# EAGLE board InkTime v6 (EAGLE 9.7.0)
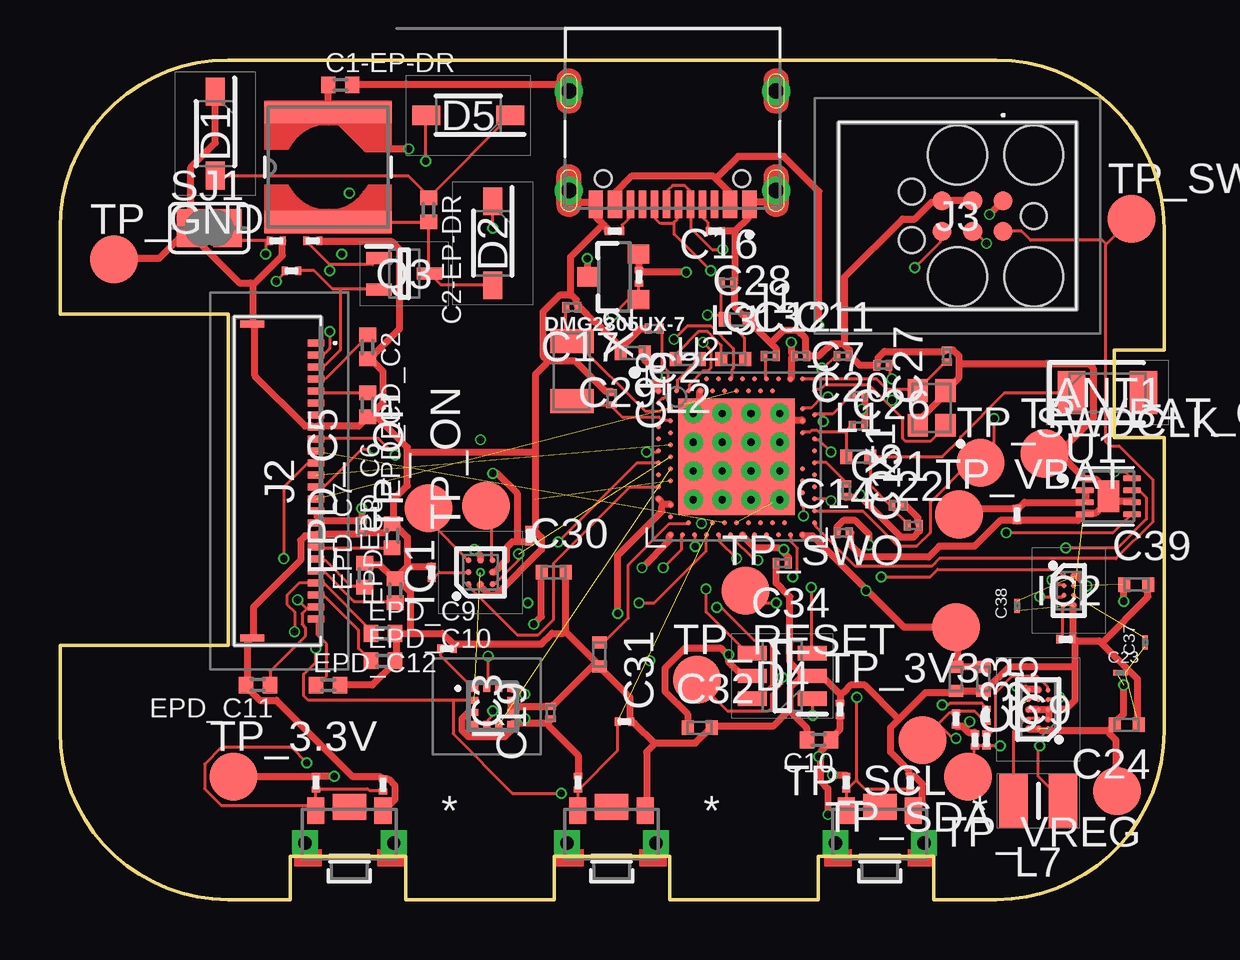
[diagram p0: board, top side]
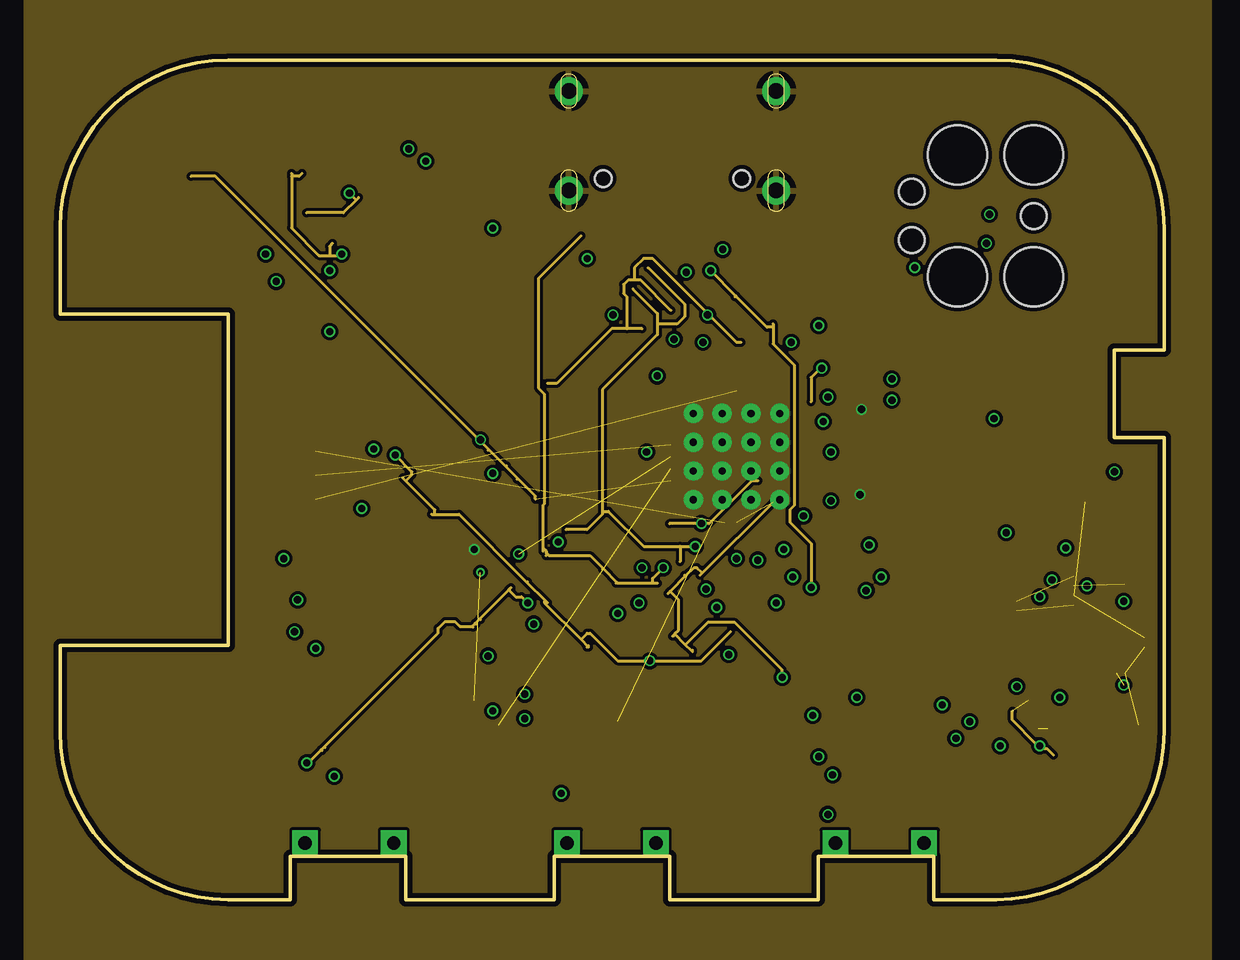
[diagram p1: board, inner layer Route2]
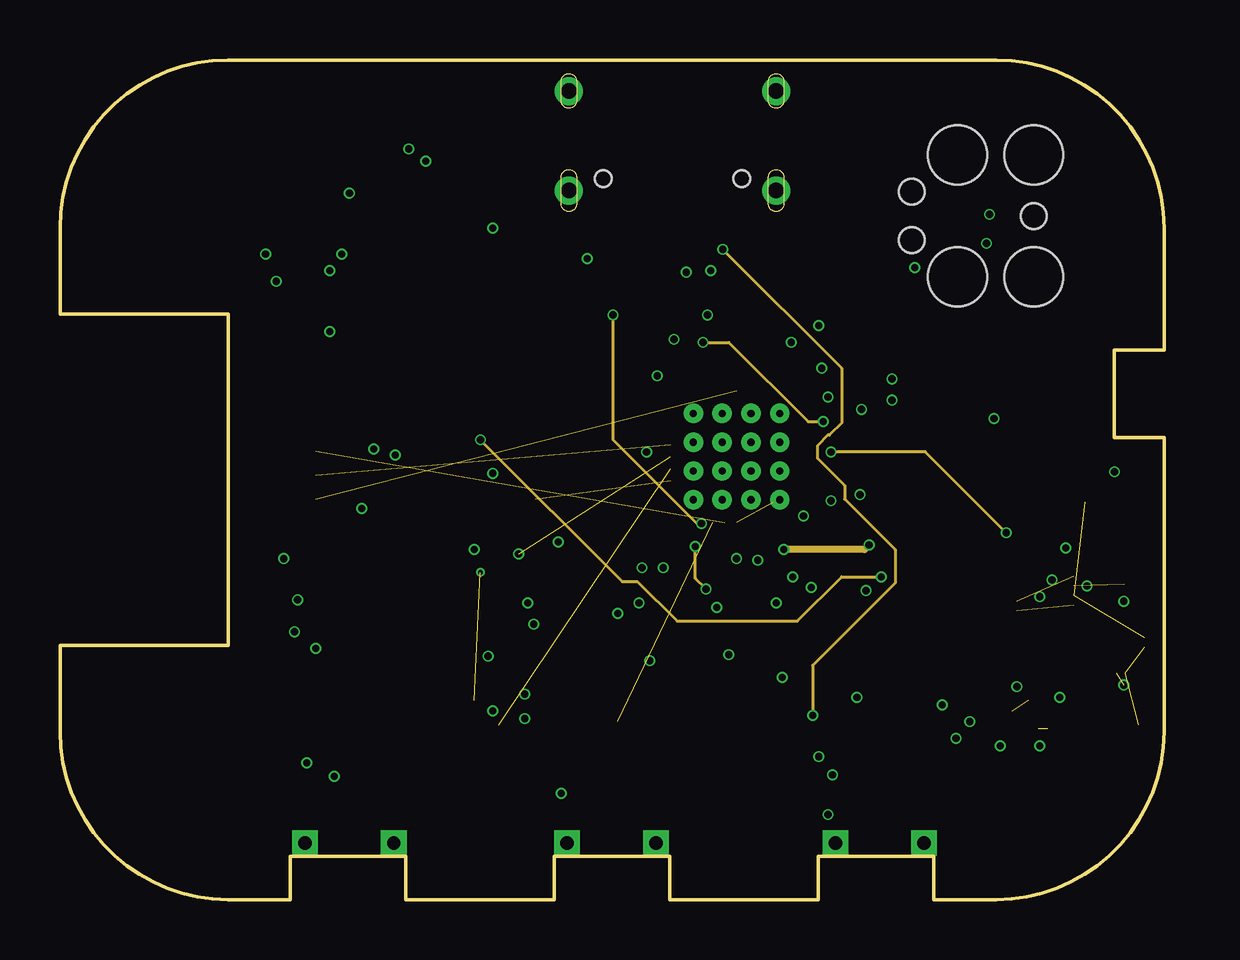
[diagram p2: board, inner layer Route15]
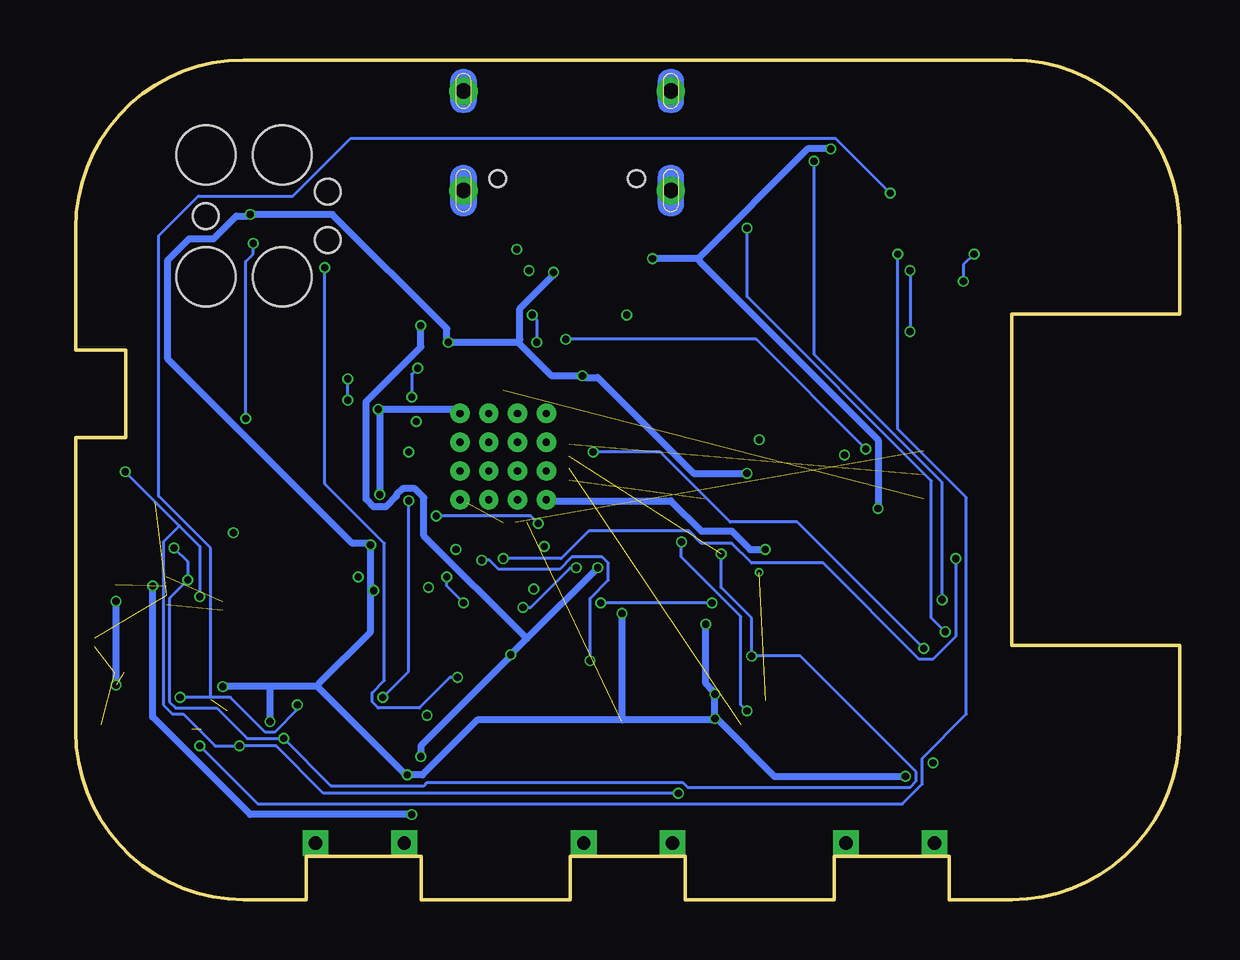
[diagram p3: board, bottom side, seen from below]

Size 46 x 35 mm. Coordinates in mm from the lower left corner, seen from the top.
Outline: 39,0 36.4,0 36.4,1.8 31.6,1.8 31.6,0 25.4,0 25.4,1.8 20.6,1.8 20.6,0 14.4,0 14.4,1.8 9.6,1.8 9.6,0 7,0 arc-90 0,7 0,10.6 7,10.6 7,24.4 0,24.4 0,28 arc-90 7,35 39,35 arc-90 46,28 46,22.91 43.92,22.91 43.92,19.26 46,19.26 46,7 arc-90 39,0
Copper layers (1+2*15+16): Top 0.035mm / dielectric 1.6mm / Route2 0.035mm / dielectric 0.15mm / Route15 0.035mm / dielectric 0.2mm / Bottom 0.035mm
Design rules "jlcpcb-2layers.dru *": minimum track width 5mil, minimum drill 0.3mm, track to track 5mil, track to pad 5mil, pad to pad 5mil, via to via 5mil, smd to smd 5mil, copper to edge 0.2mm, drill to drill 6mil, minimum pad ring 10mil, minimum via ring 3mil, stop-mask expansion 4mil, vias tented up to drill 0mil, thermal gap 10mil
Net classes: 1 turnu : width 0.3 mm

## Footprints (pad centres in the part's own frame; a part is rotated, then mirrored left to right if it is on the bottom)
2450AT18B100E_ANTC3216X140N = smd 1.15 x 1.8: 1 -1.5,0; 2 1.5,0
GRM011R60J152KE01L_1_0201 = smd 0.35 x 0.25: 1 0,0.275; 2 0,-0.275
PERFECT_0402_0402 = smd 0.6 x 0.7: 1 -0.5,0; 2 0.5,0
NORDIC_NRF_3_RESC0201_L = smd 0.28 x 0.43: 1 -0.255,0; 2 0.255,0
GRM011R60J152KE01L_2_CAPC0201X13N = smd 0.22 x 0.23: 1 -0.185,0; 2 0.185,0
NORDIC_NRF_3_RESC0402_L = smd 0.5 x 0.6: 1 -0.5,0; 2 0.5,0
ESP32_C6_LIBRARY_5_SOD3716X135N = smd 1.15 x 0.8: 1 -1.75,0; 2 1.75,0
ESP32_C6_LIBRARY_3_SOT95P280X145-6N = smd 1.2 x 0.6: 1 -1.25,0.95; 2 -1.25,0; 3 -1.25,-0.95; 4 1.25,-0.95; 5 1.25,0; 6 1.25,0.95
ESP32_C6_LIBRARY_4_ESP32_C6_LIBRARY_4_ESP32_C6_LIBRARY_4_ESP32_C6_LIBRARY_4_ESP32_WROVER_SPARKFUN-DISCRETESEMI_SOT23-3 = smd 0.8 x 0.9: 1 -0.95,-1; 2 0.95,-1; 3 0,1.1
DRV2605YZFR_BGA9C50P3X3_144X144X62 = smd 0.25 x 0.25: A1 -0.5,0.5; A2 0,0.5; A3 0.5,0.5; B1 -0.5,0; B2 0,0; B3 0.5,0; C1 -0.5,-0.5; C2 0,-0.5; C3 0.5,-0.5
BQ25180YBGR_BGA8C40P2X4_100X155X50 = smd 0.2 x 0.2: A1 -0.2,0.6; A2 0.2,0.6; B1 -0.2,0.2; B2 0.2,0.2; C1 -0.2,-0.2; C2 0.2,-0.2; D1 -0.2,-0.6; D2 0.2,-0.6
BMA423_BMA423 = smd 0.3 x 0.35: 1 -0.75,-0.775; 2 -0.25,-0.775; 3 0.25,-0.775; 4 0.75,-0.775; 7 0.75,0.775; 8 0.25,0.775; 9 -0.25,0.775; 10 -0.75,0.775 | smd 0.35 x 0.3: 5 0.775,-0.25; 6 0.775,0.25; 11 -0.775,0.25; 12 -0.775,-0.25
RT6160AWSC_BGA15C40P3X5_140X230X60 = smd 0.216 x 0.216: A1 -0.4,0.8; A2 0,0.8; A3 0.4,0.8; B1 -0.4,0.4; B2 0,0.4; B3 0.4,0.4; C1 -0.4,0; C2 0,0; C3 0.4,0; D1 -0.4,-0.4; D2 0,-0.4; D3 0.4,-0.4; E1 -0.4,-0.8; E2 0,-0.8; E3 0.4,-0.8
KH-TYPE-C-16P_KINGHELM_KH-TYPE-C-16P = smd 0.6 x 1.15: A1_B12 -3.2,4.725; A4_B9 -2.4,4.725; A9_B4 2.4,4.725; A12_B1 3.2,4.725 | smd 0.3 x 1.15: A5 -1.25,4.725; A6 -0.25,4.725; A7 0.25,4.725; A8 1.25,4.725; B5 1.75,4.725; B6 0.75,4.725; B7 -0.75,4.725; B8 -1.75,4.725 | drill 0.65 pad 1.05: SH1 -4.32,0; SH2 4.32,0; SH3 -4.32,4.15; SH4 4.32,4.15 | hole 0.7: -2.89,3.65; 2.89,3.65
503480-2400_5034802400 = smd 0.3 x 0.7: 1 -5.75,1.525; 2 -5.25,1.525; 3 -4.75,1.525; 4 -4.25,1.525; 5 -3.75,1.525; 6 -3.25,1.525; 7 -2.75,1.525; 8 -2.25,1.525; 9 -1.75,1.525; 10 -1.25,1.525; 11 -0.75,1.525; 12 -0.25,1.525; 13 0.25,1.525; 14 0.75,1.525; 15 1.25,1.525; 16 1.75,1.525; 17 2.25,1.525; 18 2.75,1.525; 19 3.25,1.525; 20 3.75,1.525; 21 4.25,1.525; 22 4.75,1.525; 23 5.25,1.525; 24 5.75,1.525 | smd 0.3 x 1: MP1 -6.54,-1.125; MP2 6.54,-1.125
TC2030-IDC_TC2030IDC = smd 0.783 x 0.783: 1 -0.953,-0.635; 2 -0.953,0.635; 3 0.317,-0.635; 4 0.317,0.635; 5 1.588,-0.635; 6 1.588,0.635 | hole 2.451: -2.223,-2.54; -2.223,2.54; 0.952,-2.54; 0.952,2.54 | hole 1.067: -2.223,0; 2.857,-1.016; 2.857,1.016
NORDIC_NRF_2_RESC0402_L = smd 0.5 x 0.6: 1 -0.5,0; 2 0.5,0
ESP32_C6_LIBRARY_2_IND_4828-WE-TPC_WRE = smd 0.9 x 5.3: 1 -2.286,0; 2 2.286,0
MLP2016SR47MT0S1_INDC2016X100N = smd 1.2 x 2.2: 1 -1.028,0; 2 1.028,0
ESP32_C6_LIBRARY_6_SOT65P210X110-3N = smd 1.05 x 0.5: 1 -1.05,0.65; 2 -1.05,-0.65; 3 1.05,0
CPF0201D7K68C1_0201 = smd 0.35 x 0.25: 1 0,0.275; 2 0,-0.275
ERA-1AEB3401C_0201 = smd 0.35 x 0.25: 1 0,0.275; 2 0,-0.275
ESP32_C6_LIBRARY_7_JUMPER_SJ = smd 1.168 x 1.6: 1 -0.762,0; 2 0.762,0
2025-10-22_07-23-44_LIBRARY_SW_EVP-AKE31A_PAN = smd 0.711 x 1.092: 1 -1.4,-0.972; 2 1.4,-0.972 | drill 0.559 pad 0.914 square: 3 -1.848,0.381; 4 1.848,0.381 | smd 1.397 x 1.092: 5 0,-1.124
HECTOR_WATCH_1_TP20R = smd 2 x 2: TP 0,0
ESP32_C6_LIBRARY_SON50P200X200X80-9N = smd 0.76 x 0.27: 1 -0.985,0.75; 2 -0.985,0.25; 3 -0.985,-0.25; 4 -0.985,-0.75; 5 0.985,-0.75; 6 0.985,-0.25; 7 0.985,0.25; 8 0.985,0.75 | smd 0.9 x 1.3: 9 0,0
NORDIC_NRF_4_AQFN50P700X700X85_HS-74N = smd 4.85 x 4.85: P$74 0,0 | drill 0.3 pad 0.6: P$75 -1.8,1.8; P$76 -0.6,1.8; P$77 0.6,1.8; P$78 1.8,1.8; P$79 -1.8,0.6; P$80 -0.6,0.6; P$81 0.6,0.6; P$82 1.8,0.6; P$83 -1.8,-0.6; P$84 -0.6,-0.6; P$85 0.6,-0.6; P$86 1.8,-0.6; P$87 -1.8,-1.8; P$88 -0.6,-1.8; P$89 0.6,-1.8; P$90 1.8,-1.8 | smd 0.2 x 0.2: P$A8 -1.25,3.25; P$A10 -0.75,3.25; P$A12 -0.25,3.25; P$A14 0.25,3.25; P$A16 0.75,3.25; P$A18 1.25,3.25; P$A20 1.75,3.25; P$A22 2.25,3.25; P$A23 2.75,3.25; P$AA24 3.25,-2.25; P$AB2 -2.75,-2.5; P$AC5 -2,-2.75; P$AC9 -1,-2.75; P$AC11 -0.5,-2.75; P$AC13 0,-2.75; P$AC15 0.5,-2.75; P$AC17 1,-2.75; P$AC19 1.5,-2.75; P$AC21 2,-2.75; P$AC24 3.25,-2.75; P$AD2 -2.75,-3.25; P$AD4 -2.25,-3.25; P$AD6 -1.75,-3.25; P$AD8 -1.25,-3.25; P$AD10 -0.75,-3.25; P$AD12 -0.25,-3.25; P$AD14 0.25,-3.25; P$AD16 0.75,-3.25; P$AD18 1.25,-3.25; P$AD20 1.75,-3.25; P$AD22 2.25,-3.25; P$AD23 2.75,-3.25; P$B1 -3.25,2.75; P$B3 -2.5,2.75; P$B5 -2,2.75; P$B7 -1.5,2.75; P$B9 -1,2.75; P$B11 -0.5,2.75; P$B13 0,2.75; P$B15 0.5,2.75; P$B17 1,2.75; P$B19 1.5,2.75; P$B24 3.25,2.75; P$C1 -3.25,2.25; P$D2 -2.75,2; P$D23 2.75,2; P$E24 3.25,1.75; P$F2 -2.75,1.5; P$F23 2.75,1.5; P$G1 -3.25,1.25; P$H2 -2.75,1; P$H23 2.75,1; P$J1 -3.25,0.75; P$J24 3.25,0.75; P$K2 -2.75,0.5; P$L1 -3.25,0.25; P$L24 3.25,0.25; P$M2 -2.75,0; P$N1 -3.25,-0.25; P$N24 3.25,-0.25; P$P2 -2.75,-0.5; P$P23 2.75,-0.5; P$R1 -3.25,-0.75; P$R24 3.25,-0.75; P$T2 -2.75,-1; P$T23 2.75,-1; P$U1 -3.25,-1.25; P$U24 3.25,-1.25; P$V23 2.75,-1.5; P$W1 -3.25,-1.75; P$W24 3.25,-1.75; P$Y2 -2.75,-2; P$Y23 2.75,-2
NORDIC_NRF_BT-XTAL_2016_N = smd 0.95 x 0.85: 1 -0.725,-0.575; 2 0.725,-0.575; 3 0.725,0.575; 4 -0.725,0.575
NORDIC_NRF_1_XTAL_3215_N = smd 1 x 1.8: 1 -1.25,0; 2 1.25,0

## Placement (x,y rotation side)
ANT1  2450AT18B100E  [2450AT18B100E_ANTC3216X140N]  43.65,21.13 0 top
C1  1uF  [GRM011R60J152KE01L_1_0201]  13.46,4.78 0 top
C1-EP-DR  10uF  [PERFECT_0402_0402]  11.68,33.96 0 top
C2  100nF  [NORDIC_NRF_3_RESC0201_L]  24.76,23.8 180 top
C2-EP-DR  4.7uF/25V  [PERFECT_0402_0402]  15.36,28.75 270 top
C3  1uF  [GRM011R60J152KE01L_1_0201]  15.49,13.64 0 top
C4  1uF  [GRM011R60J152KE01L_1_0201]  23.52,7.42 270 top
C5  1uF  [GRM011R60J152KE01L_1_0201]  35.43,4.88 0 top
C6  0.1uF  [GRM011R60J152KE01L_1_0201]  32.51,7.92 180 top
C7  N.C.  [NORDIC_NRF_3_RESC0201_L]  33.27,21.01 0 top
C8  0.1uF  [GRM011R60J152KE01L_1_0201]  19.55,15.16 0 top
C9  0.1uF  [GRM011R60J152KE01L_1_0201]  39.87,16.05 180 top
C10  4.7uF  [PERFECT_0402_0402]  31.62,6.66 180 top
C11  100pF  [NORDIC_NRF_3_RESC0201_L]  32.63,22.66 0 top
C12  100nF  [NORDIC_NRF_3_RESC0201_L]  30.86,22.66 0 top
C13  N.C.  [NORDIC_NRF_3_RESC0201_L]  29.58,22.66 0 top
C14  100nF  [NORDIC_NRF_3_RESC0201_L]  32.63,15.29 0 top
C15  820pF  [NORDIC_NRF_3_RESC0201_L]  32.76,17.07 270 top
C16  47nF  [NORDIC_NRF_3_RESC0201_L]  27.81,25.71 0 top
C17  12pF  [NORDIC_NRF_3_RESC0201_L]  21.33,24.69 180 top
C18  12pF  [NORDIC_NRF_3_RESC0201_L]  22.98,20.88 270 top
C19  100nF  [NORDIC_NRF_3_RESC0201_L]  20.44,7.8 90 top
C20  1pF  [NORDIC_NRF_3_RESC0201_L]  33.27,19.74 0 top
C21  1pF  [NORDIC_NRF_3_RESC0201_L]  34.92,16.43 0 top
C22  N.C.  [NORDIC_NRF_3_RESC0201_L]  35.55,15.6 0 top
C23  0.1uF  [GRM011R60J152KE01L_2_CAPC0201X13N]  44.19,9.45 0 top
C24  10uF  [NORDIC_NRF_3_RESC0402_L]  44.44,7.29 180 top
C25  22uF  [NORDIC_NRF_3_RESC0402_L]  38.47,9.2 270 top
C26  12pF  [NORDIC_NRF_3_RESC0201_L]  34.28,22.28 180 top
C27  12pF  [NORDIC_NRF_3_RESC0201_L]  36.95,22.66 90 top
C28  1.0μF  [NORDIC_NRF_3_RESC0402_L]  28.19,24.18 0 top
C29  4.7μF  [NORDIC_NRF_3_RESC0402_L]  23.87,22.78 180 top
C30  4.7μF  [NORDIC_NRF_3_RESC0402_L]  20.57,13.64 0 top
C31  4.7μF  [NORDIC_NRF_3_RESC0402_L]  22.47,10.21 270 top
C32  4.7μF  [NORDIC_NRF_3_RESC0402_L]  26.66,7.16 0 top
C33  22uF  [NORDIC_NRF_3_RESC0402_L]  37.33,9.2 270 top
C34  100nF  [NORDIC_NRF_3_RESC0201_L]  30.09,14.02 180 top
C37  1uF  [GRM011R60J152KE01L_2_CAPC0201X13N]  45.21,10.72 90 top
C38  1uF  [GRM011R60J152KE01L_2_CAPC0201X13N]  39.87,12.24 90 top
C39  10uF  [NORDIC_NRF_3_RESC0402_L]  44.85,13.13 0 top
D1  MBR0530  [ESP32_C6_LIBRARY_5_SOD3716X135N]  6.47,31.93 270 top
D2  MBR0530  [ESP32_C6_LIBRARY_5_SOD3716X135N]  18.03,27.36 270 top
D4  USBLC6-2SC6Y  [ESP32_C6_LIBRARY_3_SOT95P280X145-6N]  30.09,9.32 180 top
D5  MBR0530  [ESP32_C6_LIBRARY_5_SOD3716X135N]  17.01,32.69 180 top
DMG2305UX-7  20V/4.2A/52mΩ/1.4W  [ESP32_C6_LIBRARY_4_ESP32_C6_LIBRARY_4_ESP32_C6_LIBRARY_4_ESP32_C6_LIBRARY_4_ESP32_WROVER_SPARKFUN-DISCRETESEMI_SOT23-3]  23.11,25.96 90 top
EPD_C1  1uF/50V  [PERFECT_0402_0402]  12.82,20.62 270 top
EPD_C2  1uF/50V  [PERFECT_0402_0402]  12.82,23.04 270 top
EPD_C5  0.1uF/50V  [NORDIC_NRF_3_RESC0201_L]  12.57,15.55 90 top
EPD_C6  1uF/50V  [PERFECT_0402_0402]  13.84,15.16 90 top
EPD_C7  1uF/50V  [PERFECT_0402_0402]  12.69,13.51 90 top
EPD_C8  1uF/50V  [PERFECT_0402_0402]  13.96,12.88 90 top
EPD_C9  1uF/50V  [PERFECT_0402_0402]  13.46,11.1 0 top
EPD_C10  1uF/50V  [PERFECT_0402_0402]  13.46,9.96 0 top
EPD_C11  1uF/50V  [PERFECT_0402_0402]  8.25,8.94 180 top
EPD_C12  1uF/50V  [PERFECT_0402_0402]  11.17,8.94 0 top
IC1  DRV2605YZFR  [DRV2605YZFR_BGA9C50P3X3_144X144X62]  17.52,13.64 90 top
IC2  BQ25180YBGR  [BQ25180YBGR_BGA8C40P2X4_100X155X50]  42.03,12.88 0 top
IC3  BMA421  [BMA423_BMA423]  18.03,8.05 270 top
IC9  RT6160AWSC  [RT6160AWSC_BGA15C40P3X5_140X230X60]  40.76,7.92 180 top
J1  KH-TYPE-C-16P  [KH-TYPE-C-16P_KINGHELM_KH-TYPE-C-16P]  25.52,33.71 180 top
J2  503480-2400  [503480-2400_5034802400]  9.14,17.45 270 top
J3  TC2030-IDC  [TC2030-IDC_TC2030IDC]  38.35,28.5 180 top
L1  3.9nH  [NORDIC_NRF_2_RESC0402_L]  33.27,18.47 0 top
L2  10μH  [NORDIC_NRF_2_RESC0402_L]  26.16,22.53 180 top
L3  15nH  [NORDIC_NRF_2_RESC0402_L]  28.06,22.53 0 top
L5  68uH  [ESP32_C6_LIBRARY_2_IND_4828-WE-TPC_WRE]  11.17,30.53 90 top
L7  FTC252012SR47MBCA  [MLP2016SR47MT0S1_INDC2016X100N]  40.76,4.12 0 top
Q3  SI1308EDL-T1-GE3  [ESP32_C6_LIBRARY_6_SOT65P210X110-3N]  14.34,26.09 0 top
R1  10K  [CPF0201D7K68C1_0201]  41.9,10.85 270 top
R1_EP_DR1  0.47  [CPF0201D7K68C1_0201]  9.65,26.21 90 top
R1_USB  5K1  [CPF0201D7K68C1_0201]  27.3,27.86 270 top
R2  0  [CPF0201D7K68C1_0201]  38.6,6.66 180 top
R2_EP_DR  10K  [CPF0201D7K68C1_0201]  10.53,27.46 270 top
R2_USB  5K1  [CPF0201D7K68C1_0201]  23.11,27.86 270 top
R3  0  [CPF0201D7K68C1_0201]  16.12,10.47 270 top
R4  0  [CPF0201D7K68C1_0201]  38.6,7.67 180 top
R5  10K  [CPF0201D7K68C1_0201]  10.66,4.88 180 top
R7  10K  [CPF0201D7K68C1_0201]  32.76,4.88 180 top
R8  10K  [CPF0201D7K68C1_0201]  21.58,4.88 180 top
R17  3K3  [ERA-1AEB3401C_0201]  37.33,7.54 180 top
R18  3K3  [ERA-1AEB3401C_0201]  38.12,6.66 0 top
R_PWR_EPD  10K  [CPF0201D7K68C1_0201]  24.12,25.96 180 top
R_TYPE_SEL  2.2  [CPF0201D7K68C1_0201]  9.01,27.46 270 top
SJ1  [ESP32_C6_LIBRARY_7_JUMPER_SJ]  6.22,27.99 0 top
SW_DN  2025-10-22_07-23-44_LIBRARY_EVP-AKE31ASW_EVP-AKE31A_PAN  [2025-10-22_07-23-44_LIBRARY_SW_EVP-AKE31A_PAN]  34.16,2.74 180 top
SW_ENT  2025-10-22_07-23-44_LIBRARY_EVP-AKE31ASW_EVP-AKE31A_PAN  [2025-10-22_07-23-44_LIBRARY_SW_EVP-AKE31A_PAN]  22.98,2.74 180 top
SW_UP  2025-10-22_07-23-44_LIBRARY_EVP-AKE31ASW_EVP-AKE31A_PAN  [2025-10-22_07-23-44_LIBRARY_SW_EVP-AKE31A_PAN]  12.06,2.74 180 top
TP_3.3V  HECTOR_WATCH_1_TPTP20R  [HECTOR_WATCH_1_TP20R]  7.23,5.13 0 top
TP_3V3  HECTOR_WATCH_1_TPTP20R  [HECTOR_WATCH_1_TP20R]  37.33,11.35 180 top
TP_GND  HECTOR_WATCH_1_TPTP20R  [HECTOR_WATCH_1_TP20R]  2.25,26.69 0 top
TP_ON  HECTOR_WATCH_1_TPTP20R  [HECTOR_WATCH_1_TP20R]  17.74,16.41 90 top
TP_OP  HECTOR_WATCH_1_TPTP20R  [HECTOR_WATCH_1_TP20R]  15.36,16.31 90 top
TP_RESET  HECTOR_WATCH_1_TPTP20R  [HECTOR_WATCH_1_TP20R]  26.54,9.16 0 top
TP_SCL  HECTOR_WATCH_1_TPTP20R  [HECTOR_WATCH_1_TP20R]  35.94,6.66 180 top
TP_SDA  HECTOR_WATCH_1_TPTP20R  [HECTOR_WATCH_1_TP20R]  37.84,5.13 180 top
TP_SWDCLK  HECTOR_WATCH_1_TPTP20R  [HECTOR_WATCH_1_TP20R]  38.35,18.21 0 top
TP_SWIO  HECTOR_WATCH_1_TPTP20R  [HECTOR_WATCH_1_TP20R]  44.65,28.38 0 top
TP_SWO  HECTOR_WATCH_1_TPTP20R  [HECTOR_WATCH_1_TP20R]  28.57,12.88 0 top
TP_VBAT  HECTOR_WATCH_1_TPTP20R  [HECTOR_WATCH_1_TP20R]  37.46,16.05 0 top
TP_VBAT_GND  HECTOR_WATCH_1_TPTP20R  [HECTOR_WATCH_1_TP20R]  41.02,18.59 0 top
TP_VREG  HECTOR_WATCH_1_TPTP20R  [HECTOR_WATCH_1_TP20R]  44.04,4.51 180 top
U1  MAX17048G+T10  [ESP32_C6_LIBRARY_SON50P200X200X80-9N]  43.68,16.81 0 top
U2  NRF52840_QF  [NORDIC_NRF_4_AQFN50P700X700X85_HS-74N]  28.19,18.47 0 top
X1  32MHz  [NORDIC_NRF_BT-XTAL_2016_N]  36.32,20.5 90 top
X2  32.768kHz  [NORDIC_NRF_1_XTAL_3215_N]  21.33,22.02 270 top

## Library data of the parts
ANT1 = InkTime_v5; ARROW_PART_NUMBER: 2450AT18B100E; ARROW_PRICE-STOCK: https://www.arrow.com/en/products/2450at18b100e/johanson-dielectrics?utm_currency=USD&region=nac; DESCRIPTION: Antennas 2.45GHz ANTENNA; HEIGHT: 1.4mm; MANUFACTURER_NAME: JOHANSON TECHNOLOGY; MANUFACTURER_PART_NUMBER: 2450AT18B100E; MOUSER_PART_NUMBER: 609-2450AT18B100E; MOUSER_PRICE-STOCK: https://www.mouser.co.uk/ProductDetail/Johanson-Technology/2450AT18B100E?qs=yCnrNFeXz%252Bh5MFsFIXGZGA%3D%3D
C1 C1-EP-DR C2-EP-DR C3-C6 C8-C10 C34 EPD_C1 EPD_C2 EPD_C5-EPD_C12 R1_EP_DR1 R1_USB R2_EP_DR R2_USB R5 R7 R8 R_PWR_EPD R_TYPE_SEL SJ1 TP_ON TP_OP TP_VBAT TP_VBAT_GND = Library_proiect
C2 C7 C11-C22 C24-C33 C39 L1-L3 R1-R4 R17 R18 TP_3.3V TP_3V3 TP_GND TP_RESET TP_SCL TP_SDA TP_SWDCLK TP_SWIO TP_SWO TP_VREG U2 X1 X2 = InkTime_v5
C23 C37 C38 = InkTime_v5; AVAILABILITY: In Stock; CHECK_PRICES: https://www.snapeda.com/parts/GRM011R60J152KE01L/Murata/view-part/?ref=eda; DESCRIPTION: SMD Capacitor X5R(EIA) with Capacitance: 1500pF Tol. 10%. Rated Voltage: 6.3Vdc; MF: Murata; MP: GRM011R60J152KE01L; PACKAGE: 0201 Murata; PRICE: None; SNAPEDA_LINK: https://www.snapeda.com/parts/GRM011R60J152KE01L/Murata/view-part/?ref=snap
D1 D2 D5 = Library_proiect; AVAILABILITY: In Stock; CHECK_PRICES: https://www.snapeda.com/parts/MBR0530/Onsemi/view-part/?ref=eda; DESCRIPTION: Diode Schottky 30 V 500mA Surface Mount SOD-123; MF: ON Semiconductor; MP: MBR0530; PACKAGE: SOD-123-2 ON Semiconductor; PRICE: None; PURCHASE-URL: https://www.snapeda.com/api/url_track_click_mouser/?unipart_id=179458&manufacturer=ON Semiconductor&part_name=MBR0530&search_term=None; SNAPEDA_LINK: https://www.snapeda.com/parts/MBR0530/Onsemi/view-part/?ref=snap
D4 = Library_proiect; AVAILABILITY: In Stock; CHECK_PRICES: https://www.snapeda.com/parts/USBLC6-2SC6Y/STMicroelectronics/view-part/?ref=eda; DESCRIPTION: 17V Clamp 5A (8/20µs) Ipp Tvs Diode Surface Mount SOT-23-6; MF: STMicroelectronics; MP: USBLC6-2SC6Y; PACKAGE: SOT-23-6 STMicroelectronics; PRICE: None; SNAPEDA_LINK: https://www.snapeda.com/parts/USBLC6-2SC6Y/STMicroelectronics/view-part/?ref=snap
DMG2305UX-7 = Library_proiect; PROD_ID: TRAN-14388
IC1 = Library_proiect; ARROW_PART_NUMBER: DRV2605YZFR; ARROW_PRICE-STOCK: https://www.arrow.com/en/products/drv2605yzfr/texas-instruments?region=nac; DESCRIPTION: Haptic Driver for ERM/LRA with Built-In Library and Smart Loop Architecture; HEIGHT: 0.625mm; MANUFACTURER_NAME: Texas Instruments; MANUFACTURER_PART_NUMBER: DRV2605YZFR
IC2 = InkTime_v5; ARROW_PART_NUMBER: BQ25180YBGR; ARROW_PRICE-STOCK: https://www.arrow.com/en/products/bq25180ybgr/texas-instruments?utm_currency=USD&region=nac; DESCRIPTION: Charger IC Lithium Ion/Polymer, Lithium Iron Phosphate 8-DSBGA (1.6x1.1); HEIGHT: 0.5mm; MANUFACTURER_NAME: Texas Instruments; MANUFACTURER_PART_NUMBER: BQ25180YBGR; MOUSER_PART_NUMBER: 595-BQ25180YBGR; MOUSER_PRICE-STOCK: https://www.mouser.co.uk/ProductDetail/Texas-Instruments/BQ25180YBGR?qs=doiCPypUmgEWjAK%252BJAX6Tw%3D%3D
IC3 = InkTime_v5; ARROW_PART_NUMBER: BMA423; ARROW_PRICE-STOCK: https://www.arrow.com/en/products/bma423/bosch; DESCRIPTION: Accelerometers Triaxial low-g 12bit Acceleration Sensor; HEIGHT: 1mm; MANUFACTURER_NAME: BOSCH; MANUFACTURER_PART_NUMBER: BMA423; MOUSER_PART_NUMBER: 262-BMA423; MOUSER_PRICE-STOCK: https://www.mouser.co.uk/ProductDetail/Bosch-Sensortec/BMA423?qs=HXFqYaX1Q2xC%252BSgeGoX3mg%3D%3D
IC9 = InkTime_v5; DESCRIPTION: Buck-Boost Regulator Positive Output Step-Up/Step-Down I2C DC-DC Controller IC 15-WL-CSP (BSC) (1.4x2.3); HEIGHT: 0.6mm; MANUFACTURER_NAME: RICHTEK; MANUFACTURER_PART_NUMBER: RT6160AWSC; MOUSER_PART_NUMBER: 835-RT6160AWSC; MOUSER_PRICE-STOCK: https://www.mouser.co.uk/ProductDetail/Richtek/RT6160AWSC?qs=amGC7iS6iy%2FLd9PSoixZXQ%3D%3D
J1 = Library_proiect; AVAILABILITY: Not in stock; CHECK_PRICES: https://www.snapeda.com/parts/KH-TYPE-C-16P/Kinghelm/view-part/?ref=eda; MF: kinghelm; MP: KH-TYPE-C-16P; PACKAGE: None; PRICE: None; SNAPEDA_LINK: https://www.snapeda.com/parts/KH-TYPE-C-16P/Kinghelm/view-part/?ref=snap
J2 = Library_proiect; DESCRIPTION: FFC & FPC Connectors 0.5mm FPC RA SMT Dual Contact 24Ckt; HEIGHT: 1.87mm; MANUFACTURER_NAME: Molex; MANUFACTURER_PART_NUMBER: 503480-2400; MOUSER_PART_NUMBER: 538-503480-2400; MOUSER_PRICE-STOCK: https://www.mouser.co.uk/ProductDetail/Molex/503480-2400?qs=OAhjpuo3Vu7efIoxFh9AOw%3D%3D
J3 = InkTime_v5; DESCRIPTION: CABLE ADAPTER 6 POS; HEIGHT: 19mm; MANUFACTURER_NAME: Tag Connect; MANUFACTURER_PART_NUMBER: TC2030-IDC
L5 = Library_proiect; COPYRIGHT: Copyright (C) 2024 Ultra Librarian. All rights reserved.; MANUFACTURER_PART_NUMBER: 744043680; MFR_NAME: Wurth Electronics
L7 = InkTime_v5; DESCRIPTION: SMD / SMT Inductors (Coils), L=0.47?H, L x W x T :; HEIGHT: 1mm; JLCPCB: https://jlcpcb.com/partdetail/6763488-FTC252012SR47MBCA/C5832368; MANUFACTURER_NAME: TDK; MANUFACTURER_PART_NUMBER: FTC252012SR47MBCA
Q3 = Library_proiect; AVAILABILITY: In Stock; CHECK_PRICES: https://www.snapeda.com/parts/SI1308EDL-T1-GE3/Vishay+Siliconix/view-part/?ref=eda; DESCRIPTION: Si1308EDL-T1-GE3 N-channel MOSFET Transistor, 1.5 A, 30 V, 3-Pin SC-70 | Siliconix / Vishay SI1308EDL-T1-GE3; MF: Vishay Siliconix; MP: SI1308EDL-T1-GE3; PACKAGE: SOT-323 Vishay Semiconductor; PRICE: None; PURCHASE-URL: https://www.snapeda.com/api/url_track_click_mouser/?unipart_id=274603&manufacturer=Vishay Siliconix&part_name=SI1308EDL-T1-GE3&search_term=None; SNAPEDA_LINK: https://www.snapeda.com/parts/SI1308EDL-T1-GE3/Vishay+Siliconix/view-part/?ref=snap
SW_DN SW_ENT SW_UP = Library_proiect; COPYRIGHT: Copyright (C) 2025 Ultra Librarian. All rights reserved.; DIGI-KEY_PART_NUMBER_1: P123437TR-ND; DIGI-KEY_PART_NUMBER_2: P123437CT-ND; DIGI-KEY_PART_NUMBER_3: P123437DKR-ND; MANUFACTURER_NAME: Panasonic; MANUFACTURER_PART_NUMBER: EVP-AKE31A
U1 = Library_proiect; AVAILABILITY: In Stock; CHECK_PRICES: https://www.snapeda.com/parts/MAX17048G+T10/Analog+Devices/view-part/?ref=eda; DESCRIPTION: 3µA 1-Cell/2-Cell Fuel Gauge with ModelGauge; MF: Analog Devices; MP: MAX17048G+T10; PACKAGE: TDFN-8 Maxim; PRICE: None; PURCHASE-URL: https://www.snapeda.com/api/url_track_click_mouser/?unipart_id=329239&manufacturer=Analog Devices&part_name=MAX17048G+T10&search_term=None; SNAPEDA_LINK: https://www.snapeda.com/parts/MAX17048G+T10/Analog+Devices/view-part/?ref=snap

## Nets
3V3 [turnu ]: C8.2 C12.1 C14.1 C19.1 C25.1 C29.1 C30.1 C33.1 C34.1 DMG2305UX-7.2 IC1.C2 IC3.3 IC3.7 IC3.10 IC9.E2 IC9.E3 J3.1 R5.2 R7.2 R8.2 R17.1 R18.1 R_PWR_EPD.2 TP_3.3V.TP TP_3V3.TP U2.P$A22 U2.P$AD14 U2.P$AD23 U2.P$B1 U2.P$W1 U2.P$Y2
ALERT: U1.5 U2.P$J24
D+: D4.4 U2.P$AD6
D-: D4.6 U2.P$AD4
DEC1: C2.1 U2.P$C1
DEC3: C11.1 U2.P$D23
DEC4_6: C7.1 C16.1 C28.1 L3.2 U2.P$B5 U2.P$E24
DN: D4.1 J1.A7 J1.B7
DP: D4.3 J1.A6 J1.B6
EPD_3V3 [turnu ]: C1-EP-DR.1 DMG2305UX-7.3 EPD_C5.2 J2.15 J2.16 L5.2
EPD_BUSY: J2.9 U2.P$AD12
EPD_CS: J2.12 U2.P$K2
EPD_DC: J2.11 U2.P$AD10
EPD_RST: J2.10 U2.P$AC11
GDR: J2.2 Q3.1 R2_EP_DR.2
GND [turnu ]: C1-EP-DR.2 C1.1 C2.2 C3.1 C4.1 C5.1 C6.2 C7.2 C8.1 C9.1 C10.2 C11.2 C12.2 C13.2 C14.2 C15.2 C16.2 C17.1 C18.1 C19.2 C20.2 C21.2 C22.2 C23.2 C24.1 C25.2 C26.2 C27.2 C28.2 C29.2 C30.2 C31.2 C32.2 C33.2 C34.2 C37.1 C38.1 C39.2 D1.1 D4.2 EPD_C1.2 EPD_C2.2 EPD_C5.1 EPD_C6.2 EPD_C7.2 EPD_C8.2 EPD_C9.2 EPD_C10.2 EPD_C11.2 EPD_C12.2 IC1.B1 IC1.B3 IC2.D2 IC3.8 IC3.9 IC9.B1 IC9.C1 IC9.C2 IC9.C3 J1.A1_B12 J1.A12_B1 J1.SH1 J1.SH2 J1.SH3 J1.SH4 J2.8 J2.17 J2.MP1 J2.MP2 J3.3 J3.5 R1.1 R1_USB.1 R2_EP_DR.1 R2_USB.2 R3.1 R_TYPE_SEL.1 SJ1.1 SW_DN.1 SW_ENT.1 SW_UP.1 TP_GND.TP TP_VBAT_GND.TP U1.1 U1.4 U1.6 U1.9 U2.P$74 U2.P$75 U2.P$76 U2.P$77 U2.P$78 U2.P$79 U2.P$80 U2.P$81 U2.P$82 U2.P$83 U2.P$84 U2.P$85 U2.P$86 U2.P$87 U2.P$88 U2.P$89 U2.P$90 U2.P$B7 U2.P$F23 X1.2 X1.4
HAPTIC_EN: IC1.A1 U2.P$U1
IMU_INT1: IC3.5 U2.P$N1
IMU_INT2: IC3.6 U2.P$P2
LX1: IC9.B2 IC9.B3 L7.1
LX2: IC9.D2 IC9.D3 L7.2
MOSI: J2.14 U2.P$B13
N$1: C2-EP-DR.1 D1.2 D5.1
N$2: C2-EP-DR.2 D2.2 L5.1 Q3.3
N$3: R1_EP_DR1.1 R_TYPE_SEL.2 SJ1.2
N$4: IC2.D1 R1.2
N$5: C3.2 IC1.A2
N$6: J1.B5 R2_USB.1
N$7: EPD_C6.1 J2.18
N$8: EPD_C7.1 J2.19
N$9: EPD_C2.1 J2.4
N$10: J1.A5 R1_USB.2
N$11: EPD_C1.1 J2.5
N$12: EPD_C8.1 J2.20
N$14: EPD_C10.1 J2.22
N$16: EPD_C12.1 J2.24
N$17: IC9.D1 R4.2
N$18: IC9.E1 R2.2
N$19: IC3.1 R3.2
N$20: C31.1 U2.P$AC5
N$21: C17.2 U2.P$D2 X2.1
N$22: C18.2 U2.P$F2 X2.2
N$23: L2.1 U2.P$B3
N$24: L2.2 L3.1
N$25: C13.1 U2.P$A18
N$26: C15.1 U2.P$N24
N$27: C20.1 L1.1 U2.P$H23
N$28: C26.1 U2.P$B24 X1.1
N$29: C27.1 U2.P$A23 X1.3
OUT+: IC1.A3 TP_OP.TP
OUT-: IC1.C3 TP_ON.TP
P0.04: U2.P$J1
P0.09: U2.P$L24
P0.13: C1.2 R5.1 SW_UP.2 U2.P$AD8
P0.14: C4.2 R8.1 SW_ENT.2 U2.P$AC9
P0.19: U2.P$AC15
P0.20: U2.P$AD16
P0.21: U2.P$AC17
P0.22: U2.P$AD18
P0.23: U2.P$AC19
P0.24: U2.P$AD20
P0.25: U2.P$AC21
P0.26: U2.P$G1
P0.27: U2.P$H2
P0.28: U2.P$B11
P0.29: U2.P$A10
P0.30: U2.P$B9
P0.31: U2.P$A8
P1.01: DMG2305UX-7.1 R_PWR_EPD.1 U2.P$Y23
P1.02: C5.2 R7.1 SW_DN.2 U2.P$W24
P1.03: U2.P$V23
P1.04: U2.P$U24
P1.05: U2.P$T23
P1.06: U2.P$R24
P1.07: U2.P$P23
P1.09: U2.P$R1
P1.10: U2.P$A20
P1.11: U2.P$B19
P1.12: U2.P$B17
P1.13: U2.P$A16
P1.14: U2.P$B15
P1.15: U2.P$A14
PMIC_INT: IC2.A1 U2.P$T2
PREVGH: D2.1 EPD_C9.1 J2.21
PREVGL: D5.2 EPD_C11.1 J2.23
RESE: J2.3 Q3.2 R1_EP_DR1.2
RESET: J3.6 TP_RESET.TP U2.P$AC13
RF: ANT1.1 C21.1 C22.1 L1.2
SCK: J2.13 U2.P$A12
SCL: IC1.C1 IC2.B1 IC3.12 R4.1 R17.2 TP_SCL.TP U1.7 U2.P$M2
SDA: IC1.B2 IC2.C1 IC3.2 R2.1 R18.2 TP_SDA.TP U1.8 U2.P$L1
SWDCLK: J3.4 TP_SWDCLK.TP U2.P$AA24
SWDIO: J3.2 TP_SWIO.TP U2.P$AC24
SWO: TP_SWO.TP U2.P$AD22
VBAT [turnu ]: C9.2 C37.2 IC2.C2 TP_VBAT.TP U1.2 U1.3
VBUS [turnu ]: C6.1 C10.1 C32.1 C38.2 D4.5 IC2.A2 J1.A4_B9 J1.A9_B4 U2.P$AD2
VREG [turnu ]: C23.1 C24.2 C39.1 IC2.B2 IC9.A1 IC9.A2 IC9.A3 TP_VREG.TP

## Tracks (layer width: path | path; a pad name or v marks a point on that pad's centre or on a via)
3V3  (via drill 0.3)
  Top 0.3: IC1.C2 18.09,13.64 18.6,14.15 18.6,14.66 18.85,14.91 19.04,14.91 | 19.04,14.91 19.55,14.91 C8.2 | DMG2305UX-7.2 24.12,26.85 R_PWR_EPD.2 24.25,26.15 v26.09,26.15 | U2.P$A22 30.47,21.77 30.47,22.59 30.54,22.66 C12.1 30.47,22.78 v30.47,23.23 | U2.P$B1 24.89,21.26 v24.89,21.83 24.89,21.96 24.38,22.47 C29.1 | v38.73,28.56 J3.1 | J3.1 | 19.04,14.91 19.04,16.94 18.22,17.77 v18.03,17.77 | C25.1 38.47,9.7 37.33,9.7 C33.1 37.4,9.83 37.4,11.23 TP_3V3.TP 35.17,11.35 33.62,12.91 | 33.62,12.91 31.36,15.16 30.98,15.16 U2.P$AD23 | TP_3.3V.TP 10.66,5.13 R5.2 10.79,5.13 v11.42,5.13 | 30.09,14.53 30.35,14.27 C34.1 | 30.09,14.53 29.97,14.66 28.95,14.66 28.44,15.16 U2.P$AD14 | 37.68,7.13 37.59,7.23 37.33,7.23 R17.1 | 37.68,7.13 37.84,6.97 38.09,6.97 R18.1 | 25.14,16.5 25.39,16.5 U2.P$Y2 | 25.14,16.5 24.95,16.69 U2.P$W1 | 40.38,8.75 40.76,8.75 IC9.E2 | 40.38,8.75 IC9.E3 | 20.31,7.35 19.36,7.35 | 19.36,7.35 18.85,7.35 IC3.7 18.79,7.16 18.79,7.04 18.54,6.78 17.01,6.78 16.76,7.04 16.76,7.54 17.01,7.8 17.2,7.8 IC3.3 | 20.31,7.35 20.44,7.48 C19.1 | R8.2 21.58,6.02 20.38,7.23 20.31,7.35 | v19.36,8.56 19.17,8.75 18.85,8.75 IC3.10 | v19.36,7.54 19.36,7.35 | v32.19,5.19 32.76,5.19 R7.2 | v39.87,8.88 39.94,8.81 40.25,8.81 40.38,8.75 | v33.71,14.78 33.71,15.23 33.14,15.8 32.63,15.8 32.38,15.55 C14.1 | v23.23,11.92 23.23,14.34 25.08,16.18 25.08,16.37 25.14,16.5 | v19.74,11.48 20.06,11.8 C30.1 | 37.68,7.13 37.9,7.35 v37.9,7.42 | v30.16,14.59 30.09,14.53 | v33.58,12.88 33.62,12.91
  Route15 0.3: v30.16,14.59 33.52,14.59 v33.71,14.78
  Bottom 0.3: 27.55,23.23 v30.47,23.23 30.54,23.35 30.54,23.8 35.3,28.56 v38.73,28.56 38.86,28.5 39.3,28.5 40.25,27.55 41.27,27.55 42.16,26.66 42.16,22.53 34.47,14.85 33.84,14.85 v33.71,14.78 33.71,12.88 | 27.55,23.23 26.16,21.83 v24.89,21.83 24.76,21.77 24.25,21.77 20.25,17.77 v18.03,17.77 | v26.09,26.15 26.09,26.02 27.49,24.63 27.49,23.35 27.55,23.23 | v19.36,7.54 v19.36,8.56 19.42,8.69 19.74,9 v19.74,11.48 | 23.23,7.48 19.49,7.48 v19.36,7.54 | 23.23,7.48 29.27,7.48 31.55,5.19 v32.19,5.19 32.32,5.26 35.94,8.88 | 35.94,8.88 37.9,8.88 | 37.9,8.88 v39.87,8.88 | 33.71,12.88 33.71,11.16 35.87,9 35.94,8.88 | 23.23,7.48 v23.23,11.92 | 37.9,8.88 v37.9,7.42 | v11.42,5.13 16.88,5.13 19.23,7.48 v19.36,7.54 | v33.58,12.88 33.71,12.88
ALERT  (via drill 0.3)
  Top 0.127: v32.12,18.66 31.62,19.16 31.49,19.16 U2.P$J24 | v39.43,15.29 43.87,15.29 44.63,16.05 U1.5
  Route15 0.127: v32.12,18.66 36.06,18.66 v39.43,15.29
D+  (via drill 0.3)
  Top 0.127: v26.47,14.72 26.47,15.16 U2.P$AD6 | v26.92,12.94 26.92,11.99 28.63,10.27 28.82,10.27 D4.4
  Route2 0.127: 21.08,15.42 21.97,15.42 22.6,16.05 22.6,16.18 | 22.6,16.18 22.6,21.26 24.89,23.55 24.89,23.99 | 24.89,23.99 24.89,24.44 23.87,25.45 | 24.89,23.99 25.71,23.99 26.03,24.31 26.03,24.82 24.5,26.34 | 25.84,14.72 24.31,14.72 22.85,16.18 22.6,16.18 | 25.84,14.72 v26.47,14.72 | 25.84,14.72 25.84,14.08
  Route15 0.127: v26.47,14.72 26.47,13.39 v26.92,12.94
D-  (via drill 0.3)
  Top 0.127: v25.14,13.83 25.9,14.59 25.9,15.16 U2.P$AD4 | v27.36,12.18 27.55,12.18 28.95,10.78 29.52,10.78 29.65,10.66 29.65,8.94 29.14,8.43 28.89,8.43 D4.6
  Route2 0.127: 20.12,14.66 20.12,16.43 20.19,16.5 20.19,21.07 19.93,21.32 19.93,25.9 21.71,27.67 | 20.12,14.66 20.12,14.53 | 20.25,14.47 20.25,14.53 20.12,14.66 | 20.25,14.47 20.25,14.34 | 24.69,13.2 23.23,13.2 23.2,13.23 | 24.69,13.2 24.89,13.2 | 22.63,13.8 22.09,14.34 20.38,14.34 20.25,14.47 | 22.63,13.8 23.2,13.23 | 23.17,13.2 23.2,13.23 | 25.11,13.8 24.69,13.39 24.69,13.2 | 22.6,13.77 22.63,13.8 | 25.14,13.77 25.11,13.8 | v25.14,13.83 25.11,13.8
  Bottom 0.127: v25.14,13.83 25.39,13.83 27.05,12.18 v27.36,12.18
DEC1
  Top 0.127: U2.P$C1 24.95,20.75 25.08,20.88 25.14,20.88 25.33,21.07 25.33,22.02 25.08,22.28 25.08,23.8 C2.1
DEC3  (via drill 0.3)
  Top 0.127: v32,20.94 31.74,20.94 31.3,20.5 30.98,20.5 U2.P$D23 | v31.74,22.15 31.81,22.15 32.32,22.66 C11.1
  Route2 0.127: 31.3,20.75 31.3,21.77 31.71,22.18 | 31.74,22.21 31.71,22.18 | v31.74,22.15 31.71,22.18
  Bottom 0.127: v32,20.94 32,21.9 v31.74,22.15
DEC4_6  (via drill 0.3)
  Top 0.127: 27.55,24.37 27.55,24.31 C28.1 | 27.55,24.37 C16.1 | L3.2 28.51,22.53 28.51,23.42 27.74,24.18 C28.1 | 31.81,20.24 32.19,20.24 32.95,21.01 C7.1 | 31.81,20.24 31.49,20.24 U2.P$E24 | v26.79,23.23 27.11,22.91 27.11,22.15 26.98,22.02 26.79,22.02 26.22,21.45 26.22,21.26 U2.P$B5 | v31.81,19.93 31.81,20.24 | v26.98,24.37 27.55,24.37 | 27.55,24.37 C28.1
  Route2 0.127: 20.31,21.51 20.69,21.51 22.98,23.8 23.62,23.8 | 24.25,23.8 23.62,23.8 | 23.62,23.8 23.62,25.13 23.49,25.26 23.49,25.64 23.68,25.83 23.93,25.83 | 23.93,25.83 24.19,25.83 25.46,24.56 | 23.93,25.83 23.93,26.34 24.31,26.72 24.69,26.72 26.95,24.47 | 27.08,24.34 28.19,23.23 28.38,23.23 | 27.08,24.34 27.01,24.4 | 27.01,24.4 26.95,24.47 | 27.05,24.44 27.01,24.4 | 26.92,24.44 26.95,24.47 | 27.05,24.31 27.08,24.34 | v26.98,24.37 27.01,24.4
  Route15 0.127: v31.81,19.93 31.17,19.93 27.87,23.23 v26.79,23.23
  Bottom 0.127: v26.79,23.23 26.79,24.18 v26.98,24.37
DN  (via drill 0.3)
  Top 0.127: J1.A7 25.33,29.01 25.33,29.58 25.52,29.77 26.03,29.77 26.22,29.58 26.22,29.01 J1.B7 26.28,28.94 26.28,27.99 27.17,27.1 v27.62,27.1 | v31.36,7.67 31.36,8.37 D4.1
  Route15 0.127: v31.36,7.67 31.36,9.77 34.79,13.2 34.79,14.59 32.7,16.69 32.7,17.26 31.55,18.4 31.55,18.91 32,19.35 32.06,19.35 32.57,19.86 32.57,22.15 v27.62,27.1
DP  (via drill 0.3)
  Top 0.127: 25.55,28.21 25.71,28.37 25.71,28.94 J1.A6 | 25.55,28.21 25.52,28.18 25.01,28.18 24.82,28.37 24.82,28.94 J1.B6 | v31.3,13.01 31.3,10.27 D4.3 | v27.11,26.21 25.58,27.74 25.58,28.18 25.55,28.21
  Route2 0.127: v31.3,13.01 31.3,14.85 30.41,15.74 30.41,16.24 30.6,16.43 30.6,22.28 29.71,23.16 29.71,23.86 | 29.71,23.99 29.71,23.86 | 28.16,25.16 29.46,23.86 29.71,23.86 | 28.16,25.16 v27.11,26.21 | 28.12,25.13 28.16,25.16
EPD_3V3  (via drill 0.3)
  Top 0.3: 10.79,15.8 EPD_C5.2 v12.57,16.31 | 10.79,15.8 10.72,15.74 J2.16 | J2.15 10.72,16.18 10.72,15.93 10.79,15.8 | C1-EP-DR.1 L5.2 11.3,32.75 12.76,31.29 v14.54,31.29 | v21.97,26.72 21.97,25.96 DMG2305UX-7.3
  Bottom 0.3: 20.06,26.72 v21.97,26.72 | 20.06,26.72 15.49,31.29 v14.54,31.29 | v12.57,16.31 12.57,19.16 20,26.59 20.06,26.72
EPD_BUSY  (via drill 0.3)
  Top 0.127: v29.08,14.15 28.95,14.15 28,15.1 28,15.16 U2.P$AD12 | v13.96,18.53 13.27,19.23 10.72,19.23 J2.9
  Route2 0.127: 19.46,13.23 16.63,16.05 15.61,16.05 | 19.46,13.23 20.22,12.47 | 20.22,12.47 20.31,12.37 | 15.49,16.05 15.61,16.05 | 19.49,13.26 19.46,13.23 | 21.71,10.85 20.19,12.37 20.19,12.43 20.22,12.47 | 21.71,10.85 22,10.56 | 22,10.56 22.03,10.53 | 14.41,17.45 15.61,16.24 15.61,16.05 | 14.41,17.45 14.28,17.58 | 22.03,10.59 22,10.56 | 21.97,10.53 22,10.56 | 27.93,11.16 26.73,9.96 v24.57,9.96 23.23,9.96 22.09,11.1 21.97,11.1 21.71,10.85 | v13.96,18.53 14.66,17.83 14.66,17.7 14.41,17.45
  Bottom 0.127: v29.08,14.15 28.76,14.15 28.38,13.77 25.84,13.77 25.33,14.27 24.06,14.27 23.81,14.02 23.81,13.32 24.57,12.56 v24.57,9.96
EPD_CS  (1 unrouted)
EPD_DC  (via drill 0.3)
  Top 0.127: v28.19,14.21 27.49,14.91 27.49,15.16 U2.P$AD10 | v9.33,14.21 9.33,17.2 10.28,18.15 10.66,18.15 J2.11
  Bottom 0.127: v28.19,14.21 25.77,14.21 24.63,15.35 20.44,15.35 19.93,14.85 18.66,14.85 17.84,14.02 14.85,14.02 10.85,10.02 10.28,10.02 9.33,10.97 v9.33,14.21
EPD_RST  (1 unrouted)
GDR  (via drill 0.3)
  Top 0.127: 11.23,26.47 10.28,27.42 R2_EP_DR.2 | 11.23,26.47 13.01,26.47 13.27,26.72 Q3.1 | v11.23,23.67 11.23,22.97 10.98,22.72 10.72,22.72 J2.2 | 11.23,26.47 v11.23,26.21
  Bottom 0.127: v11.23,26.21 v11.23,23.67
GND  (via drill 0.3)  (3 unrouted)
  Top 0.3: IC1.B1 17.52,13.07 17.9,12.69 18.16,12.69 20.06,14.59 20.06,15.1 19.74,15.42 | 19.74,15.42 19.55,15.42 C8.1 | 23.36,23.04 22.35,24.05 22.28,24.05 21.65,24.69 C17.1 21.52,24.82 21.52,25.01 21.33,25.2 21.27,25.2 | 23.36,23.04 C29.2 | 20.31,22.47 21.46,22.47 22.73,21.2 22.98,21.2 C18.1 | 20.31,22.47 20.12,22.66 20.12,24.5 20.82,25.2 21.27,25.2 | C2.2 24.19,23.8 23.49,23.1 23.36,23.04 | 19.81,18.66 19.81,21.9 20.25,22.34 20.31,22.47 | 19.81,18.66 19.81,15.55 19.74,15.42 | U1.9 43.68,17.01 43.17,17.51 42.73,17.51 U1.1 42.6,17.64 41.65,18.59 TP_VBAT_GND.TP 41.71,18.72 43.05,20.05 43.05,22.15 42.86,22.34 37.46,22.34 | U1.6 44.63,16.62 43.94,16.62 43.81,16.75 U1.9 | C14.2 32.95,15.29 32.95,14.78 33.46,14.27 36.19,14.27 36.63,14.72 38.09,14.72 39.17,15.8 39.75,15.8 C9.1 39.87,15.8 42.41,15.8 42.67,16.05 U1.4 42.79,16.12 43.17,16.12 43.62,16.56 43.62,16.69 U1.9 | 37.46,22.34 37.46,21.77 36.95,21.26 X1.2 36.95,21.13 35.75,19.93 35.75,19.8 X1.4 | 37.46,22.34 37.46,22.66 37.2,22.91 C27.2 36.82,22.85 34.35,22.85 34.09,22.59 34.09,22.4 C26.2 33.33,22.28 33.01,22.59 C11.2 32.89,22.91 32.63,23.16 | J3.3 J3.5 36.63,29.07 36.32,29.07 35.62,28.37 35.11,28.37 32.7,25.96 32.7,23.29 32.63,23.16 | 32.63,23.16 32.12,23.16 31.62,22.66 C12.2 31.05,22.78 31.05,23.42 30.73,23.74 30.16,23.74 29.62,23.2 | 26.41,20.31 26.66,20.56 26.66,21.2 U2.P$B7 | U2.P$F23 30.92,19.99 30.28,19.99 30.03,20.24 U2.P$74 26.41,20.31 | 29.62,23.2 28.76,24.05 C28.2 28.63,24.18 28.12,24.69 28.12,25.71 C16.2 28.12,25.83 28.12,27.86 | 29.62,23.2 29.84,22.97 C13.2 | 33.33,16.75 33.39,16.75 35.05,15.1 35.55,15.1 35.81,15.35 35.81,15.55 C22.2 35.75,15.74 35.75,15.93 35.24,16.43 C21.2
  Top 0.3: 33.33,16.75 32.76,16.75 C15.2 | 28.12,27.86 R1_USB.1 | 28.12,27.86 28.7,28.43 28.7,28.94 J1.A1_B12 28.82,29.07 29.39,29.07 29.84,29.51 J1.SH3 | 22.63,28.15 22.35,28.43 22.35,28.94 J1.A12_B1 22.22,29.07 21.65,29.07 21.2,29.51 J1.SH4 | 22.63,28.15 22.79,27.99 22.79,27.86 R2_USB.2 | 33.52,20.43 C7.2 | 33.52,20.43 C20.2 | IC1.B3 17.52,14.34 v17.27,14.59 | C1-EP-DR.2 20.88,33.96 21.14,33.71 J1.SH2 | v33.39,20.43 33.52,20.43 | v33.33,16.88 33.33,16.75 | 26.41,20.31 U2.P$75 | 21.27,25.2 21.27,26.79 22.63,28.15 | 18.79,8.05 18.79,8.24 IC3.9 | 18.79,8.05 18.79,7.86 IC3.8 | 18.79,8.05 C19.2 20.57,8.12 22.28,9.83 C31.2 | C31.2 23.74,8.43 23.74,7.42 C4.1 23.93,7.35 24.76,6.53 | 24.76,6.53 26.47,6.53 27.11,7.16 C32.2 27.3,7.23 29.71,7.23 30.28,7.8 30.41,7.86 | 21.08,11.16 C30.2 | 21.08,11.16 22.41,9.83 C31.2 | SW_ENT.1 24.44,3.73 24.44,6.15 24.69,6.4 24.76,6.53 | 32.51,8.56 C6.2 | 32.51,8.56 31.74,9.32 D4.2 | C34.2 29.84,13.2 30.41,12.62 30.41,9.89 30.92,9.39 31.24,9.39 D4.2 | 30.41,7.86 31.11,7.16 31.11,6.66 C10.2 | 30.41,7.86 30.41,8.81 30.86,9.26 D4.2 | SW_DN.1 35.62,3.73 35.94,4.05 35.94,4.81 35.62,5.13 35.43,5.13 C5.1 35.36,5.26 35.36,5.38 34.6,6.15 34.6,7.16 34.95,7.51 | IC9.C3 IC9.C2 IC9.C1 41.21,7.92 | 41.21,7.92 41.21,7.54 IC9.B1 | 42.22,10.85 42.22,12.24 IC2.D2 | 42.22,10.85 R1.1 | 43.4,10.69 43.3,10.78 42.35,10.78 | 43.4,10.69 44.89,9.2 44.89,7.29 C24.1 | 42.35,10.78 42.22,10.85 | 43.4,10.69 45.33,12.62 45.33,13.13 C39.2 | 41.21,7.92 41.9,7.92 42.28,8.31 42.28,9.7 | 42.28,9.7 42.28,10.66 42.35,10.78 | 42.28,9.7 39.55,9.7 38.6,8.75 C25.2 C33.2 37.2,8.62 36.06,8.62 34.95,7.51 | 34.95,7.51 33.52,8.94 32.95,8.94 32.63,8.62 32.51,8.56
  Top 0.3: 8.06,25.64 9.27,26.85 9.27,27.42 R_TYPE_SEL.1 | 8.06,25.64 8.06,23.99 J2.MP1 8.12,23.86 8.12,21.83 10.22,19.74 10.53,19.74 J2.8 10.72,19.74 12.44,19.74 EPD_C1.2 | D1.1 6.47,31.55 5.45,30.53 SJ1.1 | TP_GND.TP 2.28,26.72 4.12,26.72 5.33,27.93 SJ1.1 | 8.06,25.64 7.93,25.71 7.49,25.71 5.39,27.8 SJ1.1 | SW_UP.1 13.52,3.73 13.96,4.18 13.96,4.75 13.71,5 13.46,5 C1.1 13.33,5.13 12.19,5.13 9.01,8.31 8.31,8.31 7.8,8.81 EPD_C11.2 7.8,8.94 7.8,10.72 7.99,10.91 J2.MP2 8.06,11.04 8.06,12.18 10.03,14.15 10.03,14.97 10.22,15.16 10.53,15.16 J2.17 10.72,15.23 12.44,15.23 EPD_C5.1 13.52,15.29 13.84,15.61 EPD_C6.2 | R2_EP_DR.1 10.85,27.42 13.84,27.42 14.16,27.1 14.16,23.8 12.95,22.59 12.82,22.59 EPD_C2.2 13.01,22.47 13.46,22.02 13.46,20.69 12.95,20.18 EPD_C1.2 | 16.38,10.66 16.38,10.47 R3.1 | 16.38,10.66 15.93,11.1 14.6,11.1 | 14.6,11.1 EPD_C9.2 14.03,10.97 14.03,10.08 EPD_C10.2 13.9,9.96 13.9,9.83 13.01,8.94 EPD_C12.2 | 14.47,13.89 15.49,13.89 C3.1 | 14.47,13.89 EPD_C8.2 | EPD_C7.2 12.69,13.96 13.33,13.96 13.84,13.45 EPD_C8.2 | 14.47,13.89 14.47,15.1 13.96,15.61 EPD_C6.2 | 14.6,11.1 14.6,12.81 14.09,13.32 EPD_C8.2 | 14.47,18.66 14.47,17.26 13.9,16.69 13.9,15.8 EPD_C6.2 | 14.47,18.66 14.47,18.85 13.14,20.18 EPD_C1.2 | 16.38,10.66 20.06,10.66 20.5,11.1 20.95,11.1 21.08,11.16 | 14.47,18.66 19.81,18.66
  Bottom 0.3: v17.27,14.59 17.9,14.59 18.66,15.35 19.93,15.35 21.2,16.62 26.35,16.62 U2.P$87 | U2.P$78 30.16,20.43 v33.39,20.43 33.33,20.31 v33.33,16.88
  pour Route2: -1.45,-2.79 47.92,-2.79 47.92,38.96 -1.45,38.96
HAPTIC_EN
  Top 0.127: U2.P$U1 24.89,17.2 23.74,17.2 20.57,14.02 20.57,11.67 19.93,11.04 19.04,11.04 17.08,13.01 17.08,13.13 IC1.A1
IMU_INT1  (via drill 0.3)
  Top 0.127: v20.76,14.91 24.06,18.21 24.89,18.21 U2.P$N1 | v18.03,7.86 18.03,7.67 17.84,7.48 17.84,7.29 IC3.5
  Bottom 0.127: v20.76,14.91 20.76,14.27 18.28,11.8 18.28,8.12 v18.03,7.86
IMU_INT2  (1 unrouted)
LX1
  Top 0.127: IC9.B2 40.76,7.54 40.38,7.54 IC9.B3 40.32,7.54 40.25,7.54 39.75,7.04 39.75,4.12 L7.1
LX2  (via drill 0.3)  (1 unrouted)
  Top 0.127: IC9.D3 40.38,8.37 40.76,8.37 IC9.D2 | v40.83,6.4 40.76,6.4 40.76,5.13 41.78,4.12 L7.2
  Route2 0.127: 11.23,26.85 10.79,26.85 9.65,27.99 9.65,30.15 | 11.23,26.85 11.68,26.85 11.71,26.88 | 9.65,30.28 9.65,30.15 | 9.65,30.15 9.96,30.15 10.09,30.28 | 39.68,7.86 39.68,7.48 40.67,6.5 | 40.79,6.37 40.89,6.27 41.14,6.27 41.4,6.02 | 40.79,6.37 40.67,6.5 | 11.23,26.85 11.23,27.23 11.36,27.36 | 40.7,6.53 40.67,6.5 | 11.68,26.91 11.71,26.88 | v40.83,6.4 40.79,6.37 | v11.74,26.91 11.71,26.88
  Bottom 0.127: v11.74,26.91 11.74,19.61 8.88,16.75 8.88,7.73 10.72,5.89 10.72,4.81 11.55,3.99 38.41,3.99 v40.83,6.4
MOSI  (1 unrouted)
N$1
  Top 0.127: D5.1 18.79,32.69 15.36,29.26 C2-EP-DR.1 15.36,29.32 14.54,30.15 6.47,30.15 D1.2
N$2
  Top 0.127: C2-EP-DR.2 15.36,26.09 Q3.3 15.42,26.09 15.87,25.64 18.03,25.64 D2.2 | L5.1 C2-EP-DR.2 | C2-EP-DR.2
N$3  (via drill 0.3)
  Top 0.127: 8.57,27.48 7.49,27.48 SJ1.2 | 8.57,27.48 8.69,27.48 R_TYPE_SEL.2 | v9.01,25.77 9.33,26.09 9.33,26.21 R1_EP_DR1.1 | 8.57,27.48 v8.57,26.91
  Bottom 0.127: v9.01,25.77 9.01,26.47 v8.57,26.91
N$4
  Top 0.127: IC2.D1 41.78,12.24 41.78,10.97 41.65,10.85 R1.2
N$5
  Top 0.127: IC1.A2 15.8,13.64 15.49,13.32 C3.2
N$6
  Top 0.127: R2_USB.1 23.43,27.86 23.43,28.12 23.74,28.43 23.74,28.94 J1.B5
N$7
  Top 0.127: EPD_C6.1 10.72,14.66 J2.18
N$8
  Top 0.127: EPD_C7.1 12.69,13.07 12.12,13.07 11.04,14.15 10.72,14.15 J2.19
N$9
  Top 0.127: J2.4 10.72,21.7 11.04,21.7 12.82,23.48 EPD_C2.1
N$10
  Top 0.127: R1_USB.2 26.98,27.86 26.98,28.24 26.79,28.43 26.79,28.94 J1.A5
N$11
  Top 0.127: EPD_C1.1 12.82,21.13 10.79,21.13 10.72,21.2 J2.5
N$12
  Top 0.127: EPD_C8.1 13.96,12.43 12.25,12.43 11.04,13.64 10.72,13.64 J2.20
N$13  (via drill 0.2)
  other vias: 17.52,13.64
N$14
  Top 0.127: J2.22 10.72,12.69 10.98,12.69 12.44,11.23 12.44,10.47 12.95,9.96 EPD_C10.1
N$16
  Top 0.127: J2.24 10.72,11.67 10.72,11.04 11.11,10.66 11.11,9.32 10.72,8.94 EPD_C12.1
N$17  (via drill 0.3)
  Top 0.127: v41.65,8.43 41.59,8.37 41.21,8.37 IC9.D1 | v36.76,8.12 37.02,8.12 37.08,8.18 38.41,8.18 38.6,7.99 R4.2
  Route2 0.127: 10.28,28.63 11.8,28.63 12.34,29.17 | 12.44,29.26 12.34,29.17 | v12.06,29.45 12.34,29.17
  Bottom 0.127: 40.38,8.43 39.55,8.43 38.09,6.97 37.71,6.97 36.76,7.92 v36.76,8.12 | 40.38,8.43 v41.65,8.43 | v12.06,29.45 14.34,31.74 34.54,31.74 36.95,29.32 40.89,29.32 42.54,27.67 42.54,16.81 40.38,14.66 40.38,8.43
N$18
  Top 0.127: IC9.E1 41.14,8.75 41.14,8.88 40.7,9.32 39.68,9.32 38.98,8.62 38.98,7.16 38.79,6.97 38.6,6.97 R2.2
N$19
  Top 0.127: R3.2 15.87,10.47 15.87,10.15 17.2,8.81 IC3.1
N$20
  Top 0.127: U2.P$AC5 26.16,15.67 25.39,15.67 23.68,13.96 23.68,11.73 22.66,10.72 C31.1
N$21
  Top 0.127: U2.P$D2 25.39,20.43 25.08,20.43 25.01,20.37 24.38,20.37 21.52,23.23 21.33,23.23 X2.1 21.33,23.29 21.08,23.55 C17.2
N$22
  Top 0.127: U2.P$F2 25.39,19.99 25.08,19.99 24.95,20.12 23.43,20.12 22.98,20.56 C18.2 21.46,20.62 21.33,20.75 X2.2
N$23
  Top 0.127: U2.P$B3 25.71,21.26 25.71,21.64 26.6,22.53 L2.1
N$24
  Top 0.127: L2.2 25.71,22.53 25.71,22.78 26.6,23.67 26.98,23.67 27.55,23.1 L3.1
N$25
  Top 0.127: U2.P$A18 29.39,21.77 29.39,22.59 C13.1
N$26
  Top 0.127: U2.P$N24 31.49,18.21 31.94,18.21 32.76,17.39 C15.1
N$27
  Top 0.127: 32.73,19.51 32.95,19.74 C20.1 | 32.73,19.51 32.7,19.48 31.62,19.48 31.55,19.55 31.3,19.55 31.24,19.48 30.98,19.48 U2.P$H23 | L1.1 32.76,19.48 32.73,19.51
N$28  (via drill 0.3)
  Top 0.127: 34.51,20.66 35.11,20.05 35.11,19.23 35.24,19.1 36.25,19.1 36.89,19.74 X1.1 | 34.51,20.66 33.71,21.45 31.87,21.45 31.68,21.26 31.49,21.26 U2.P$B24 | v34.66,21.7 34.6,21.77 34.6,22.28 C26.1 | 34.51,20.66 v34.66,20.81
  Bottom 0.127: v34.66,20.81 v34.66,21.7
N$29
  Top 0.127: U2.P$A23 30.98,21.7 34.03,21.7 34.47,21.26 35.68,21.26 X1.3 35.75,21.26 36.82,22.34 36.95,22.34 C27.1
OUT+
  Top 0.127: IC1.A3 15.36,15.8 TP_OP.TP
OUT-
  Top 0.127: IC1.C3 17.97,14.15 17.97,16.18 17.77,16.37 TP_ON.TP
P0.13  (via drill 0.3)
  Top 0.127: 10.66,3.92 10.66,3.73 SW_UP.2 10.66,3.92 | 10.66,3.92 R5.1 10.66,4.62 12.82,4.62 12.88,4.56 13.46,4.56 C1.2 | v24.12,12.37 24.76,12.37 26.92,14.53 26.92,15.16 U2.P$AD8 | 10.66,3.92 6.72,3.92 6.03,4.62 6.03,5.64 6.72,6.34 9.65,6.34 v10.28,5.7
  Route2 0.127: 17.17,11.39 17.3,11.51 | 17.3,11.51 17.49,11.7 | 17.49,11.7 18.69,12.91 | 18.69,12.91 18.79,13.01 | 10.28,5.64 10.31,5.67 | 10.31,5.67 10.88,6.24 | 10.88,6.24 11.01,6.37 | v19.49,12.37 19.23,12.62 18.98,12.62 18.69,12.91 | 10.34,5.64 10.31,5.67 | 17.2,11.35 17.17,11.39 | 11.04,6.34 11.01,6.37 | 17.52,11.67 17.49,11.7 | 17.33,11.48 17.3,11.51 | 10.92,6.21 10.88,6.24 | 11.01,6.37 15.76,11.11 15.76,11.3 16.05,11.59 16.45,11.59 16.66,11.39 17.17,11.39 | v10.28,5.7 10.31,5.67
  Bottom 0.127: v19.49,12.37 v24.12,12.37
P0.14  (1 unrouted)
  Top 0.127: 21.58,4.56 21.58,3.73 SW_ENT.2 | 21.58,4.56 23.23,6.21 23.23,7.42 C4.2 | 21.58,4.56 R8.1
P1.01  (via drill 0.3)
  Top 0.127: R_PWR_EPD.1 24.12,25.07 DMG2305UX-7.1 24.06,25.01 23.68,25.01 v23.05,24.37 | v30.98,15.99 30.98,16.43 U2.P$Y23
  Route2 0.127: 25.39,15.67 v26.73,15.67 27.05,15.67 28.82,17.45 29.08,17.45
  Route15 0.127: v23.05,24.37 23.05,19.16 26.54,15.67 v26.73,15.67
  Bottom 0.127: v30.98,15.99 27.05,15.99 v26.73,15.67
P1.02  (via drill 0.3)
  Top 0.127: v32.12,16.62 32.06,16.69 31.49,16.69 U2.P$W24 | v33.2,8.43 33.2,5 33.17,4.97 | 32.76,4.56 33.17,4.97 | 33.17,4.97 33.52,4.62 35.43,4.62 C5.2 | 32.76,4.56 32.76,3.73 SW_DN.2 | 32.76,4.56 R7.1
  Bottom 0.127: v32.12,16.62 32.12,9.51 v33.2,8.43
PMIC_INT  (via drill 0.3)  (1 unrouted)
  Top 0.127: v34.22,13.45 36.25,13.45 36.57,13.77 41.52,13.77 41.78,13.51 IC2.A1
  Route2 0.127: 5.45,30.15 6.47,30.15 17.36,19.26 | 19.08,17.55 19.81,16.81 19.81,16.69 | 19.08,17.55 18.57,18.05 | 18.57,18.05 17.87,18.75 | 17.87,18.75 17.49,19.13 | 17.49,19.13 17.36,19.26 | 17.39,19.29 17.36,19.26 | 18.6,18.09 18.57,18.05 | 19.04,17.51 19.08,17.55 | 17.84,18.72 17.87,18.75 | v17.52,19.16 17.49,19.13
  Route15 0.127: v34.22,13.45 32.57,13.45 30.73,11.61 25.71,11.61 24.06,13.26 23.43,13.26 v17.52,19.16
PREVGH  (via drill 0.3)
  Top 0.127: EPD_C9.1 12.95,11.1 12.95,11.23 10.98,13.2 10.72,13.2 J2.21 9.96,13.2 9.46,12.69 9.46,12.31 9.77,11.99 v9.77,11.16 | v18.03,27.99 D2.1
  Bottom 0.127: v18.03,27.99 18.03,25.13 10.34,17.45 10.34,11.73 v9.77,11.16
PREVGL  (via drill 0.3)
  Top 0.127: 10.28,12.12 10.34,12.18 10.66,12.18 J2.23 | 10.28,12.12 10.09,11.92 10.09,11.48 10.22,11.35 10.22,10.97 8.76,9.51 EPD_C11.1 | v15.23,30.79 15.23,32.69 D5.2 | 10.28,12.12 v9.9,12.5
  Bottom 0.127: v15.23,30.79 15.23,22.72 9.9,17.39 v9.9,12.5
RESE
  Top 0.127: R1_EP_DR1.2 10.6,26.21 11.36,25.45 11.68,25.45 | 11.68,25.45 13.27,25.45 Q3.2 | 11.68,25.45 11.68,22.91 10.98,22.21 10.72,22.21 J2.3
RESET  (via drill 0.3)  (1 unrouted)
  Top 0.127: v35.62,26.34 36.7,27.42 36.7,27.86 J3.6 | v30.09,9.26 30.09,9 29.65,8.56 29.65,7.99 29.52,7.86 27.81,7.86 26.54,9.13 TP_RESET.TP
  Route2 0.127: 26.66,13.51 26.76,13.61 | 26.76,13.61 29.71,16.56 | 26.06,13.48 26.41,13.83 26.54,13.83 26.76,13.61 | 26.06,13.48 25.43,12.85 | 25.43,12.85 25.33,12.75 | 26.03,13.51 26.06,13.48 | 25.43,12.85 25.77,12.5 25.77,11.23 25.62,11.07 | 25.52,10.97 25.62,11.07 | 26.35,10.34 26.31,10.37 | 26.31,10.37 26.06,10.62 | 26.06,10.62 25.62,11.07 | 26.35,10.4 26.31,10.37 | 26.06,10.62 26.98,11.54 28.12,11.54 30.09,9.58 v30.09,9.26
  Bottom 0.127: v35.62,26.34 35.62,17.32 33.14,14.85 33.14,9.13 33.65,8.62 33.65,8.24 33.39,7.99 31.68,7.99 30.41,9.26 v30.09,9.26
RF
  Top 0.127: C22.1 35.24,15.61 35.24,15.74 34.66,16.31 C21.1 34.6,16.43 33.78,17.26 L1.2 | ANT1.1 39.36,21.13 37.52,19.29 37.52,19.23 36.76,18.47 L1.2 | L1.2
SCK  (via drill 0.3)
  Top 0.127: v25.58,23.35 26.16,23.93 27.11,23.93 28.06,22.97 28.06,22.15 28,22.09 28,21.77 U2.P$A12 | v13.08,18.78 12.57,18.78 11.04,17.26 10.72,17.26 J2.13
  Bottom 0.127: v25.58,23.35 17.65,23.35 v13.08,18.78
SCL  (via drill 0.3)  (1 unrouted)
  Top 0.127: v19.11,14.4 19.11,14.15 18.16,13.2 18.03,13.2 IC1.C1 | v17.84,10.15 17.84,8.88 IC3.12 | R4.1 38.6,7.42 38.41,7.61 38.35,7.61 38.09,7.86 37.33,7.86 R17.2 37.33,7.8 37.08,7.8 TP_SCL.TP 36.63,7.29 37.2,6.72 v37.33,6.72 | v41.33,13.32 41.52,13.13 41.78,13.13 IC2.B1 | v41.9,14.66 44.06,14.66 45.27,15.86 45.27,16.75 45.02,17.01 44.7,17.01 U1.7
  Bottom 0.127: v19.11,14.4 19.11,13.01 17.84,11.73 v17.84,10.15 15.8,10.15 10.98,5.32 10.98,4.94 11.23,4.69 20.5,4.69 20.69,4.88 31.36,4.88 31.49,4.75 35.36,4.75 v37.33,6.72 38.86,6.72 40.13,7.99 41.84,7.99 42.09,8.24 42.09,12.56 v41.33,13.32 41.33,14.08 v41.9,14.66
SDA  (via drill 0.3)  (1 unrouted)
  Top 0.127: 38.6,6.4 38.16,6.4 R18.2 38.09,6.34 38.09,5.38 TP_SDA.TP | v40.83,12.62 41.78,12.62 IC2.C1 | v43.94,17.83 44.38,17.83 44.63,17.58 U1.8 | v39.17,6.4 38.6,6.4 | 38.6,6.4 R2.1 | v24.44,18.66 24.89,18.66 U2.P$L1 | v10.66,10.47 10.66,9.89 10.15,9.39 10.15,8.5 10.34,8.31 16.38,8.31 | 16.38,8.31 17.2,8.31 IC3.2 | v20.88,4.43 18.85,4.43 16.38,6.91 16.38,8.31
  Bottom 0.127: v40.83,12.62 40.83,14.72 41.68,15.58 | v43.94,17.83 41.68,15.58 | 41.68,15.58 42.35,14.91 42.35,8.12 41.97,7.73 41.52,7.73 40.19,6.4 v39.17,6.4 37.65,6.4 35.68,4.43 v20.88,4.43 | v24.44,18.66 21.65,18.66 18.73,15.74 15.93,15.74 v10.66,10.47
SWDCLK  (via drill 0.3)
  Top 0.127: U2.P$AA24 31.49,16.18 33.46,16.18 34.92,14.72 35.68,14.72 36.25,15.29 36.25,16.56 37.9,18.21 TP_SWDCLK.TP 38.92,18.78 v38.92,20.05 | v38.6,27.36 38.09,27.86 J3.4
  Bottom 0.127: v38.6,27.36 38.6,26.91 38.92,26.59 v38.92,20.05
SWDIO
  Top 0.127: 43.59,27.32 44.63,28.37 TP_SWIO.TP | 43.59,27.32 43.55,27.29 43.55,19.1 43.75,18.91 44.13,18.91 45.52,17.51 45.52,15.74 44,14.21 36.63,14.21 36.32,13.89 33.14,13.89 31.49,15.55 31.49,15.67 U2.P$AC24 | J3.2 40.06,27.86 40.44,27.48 43.43,27.48 43.59,27.32
SWO  (via drill 0.3)
  Top 0.127: v30.54,13.45 30.73,13.64 30.73,14.66 30.47,14.91 30.47,15.16 U2.P$AD22 | v29.84,12.37 29.08,12.37 TP_SWO.TP
  Bottom 0.127: v30.54,13.45 30.54,13.07 v29.84,12.37
VBAT  (2 unrouted)
  Top 0.3: U1.2 42.73,17.01 42.73,16.62 U1.3 42.6,16.56 40.19,16.56 40,16.37 C9.2 39.87,16.31 37.71,16.31 TP_VBAT.TP
VBUS  (via drill 0.3)  (1 unrouted)
  Top 0.3: v42.79,13.07 42.35,13.51 42.28,13.51 IC2.A2 | v32,3.54 32,4.62 31.68,4.94 31.68,5.96 | 31.68,5.96 31.68,6.15 32.06,6.53 32.06,6.66 C10.1 32.19,6.78 32.51,7.1 C6.1 | 27.33,30.05 27.87,29.51 27.87,29.01 J1.A4_B9 | 27.33,30.05 27.24,30.15 23.81,30.15 23.17,29.51 23.17,29.01 J1.A9_B4 | v24.25,13.83 25.39,14.97 25.39,15.16 U2.P$AD2 | D4.5 28.44,9.32 27.87,9.89 v27.87,10.21 27.74,10.27 27.55,10.47 26.03,10.47 25.2,9.64 25.2,8.69 26.16,7.73 C32.1 | 27.33,30.05 28.25,30.98 30.16,30.98 31.62,29.51 v31.62,23.93 | v31.62,5.96 31.68,5.96
  Bottom 0.3: v42.79,13.07 42.79,7.61 38.73,3.54 v32,3.54 | 27.2,10.88 v27.87,10.21 27.93,10.08 31.62,6.4 v31.62,5.96 | 27.2,10.88 v24.25,13.83 | v31.62,23.93 31.62,23.04 33.9,20.75 33.9,16.69 33.58,16.37 33.08,16.37 32.63,16.81 32.63,16.88 32.38,17.13 31.87,17.13 31.49,16.75 31.49,15.16 27.2,10.88
VREG  (via drill 0.3)  (3 unrouted)
  Top 0.3: 40.76,7.1 40.38,7.1 IC9.A3 | 40.76,7.1 IC9.A2 | 43.68,7.04 40.89,7.04 40.76,7.1 | 43.68,7.04 C24.2 44,7.42 44.32,7.73 v44.32,8.94 | v44.32,12.43 44.32,13.13 C39.1 | TP_VREG.TP 44,4.56 44,6.66 43.75,6.91 43.68,7.04
  Bottom 0.3: v44.32,8.94 v44.32,12.43